# Altium PCB PCB.PcbDoc (part 1 of 3)
Units mil, origin at the board's own origin, x right, y up, seen from the top; angles counter-clockwise.
Board outline 8690 x 2710 mil, 2 copper layers (Top Layer, Bottom Layer); 78 components, 139 nets, 435 pads, 186 vias.
Unrouted connection lines stored in the file: 1.
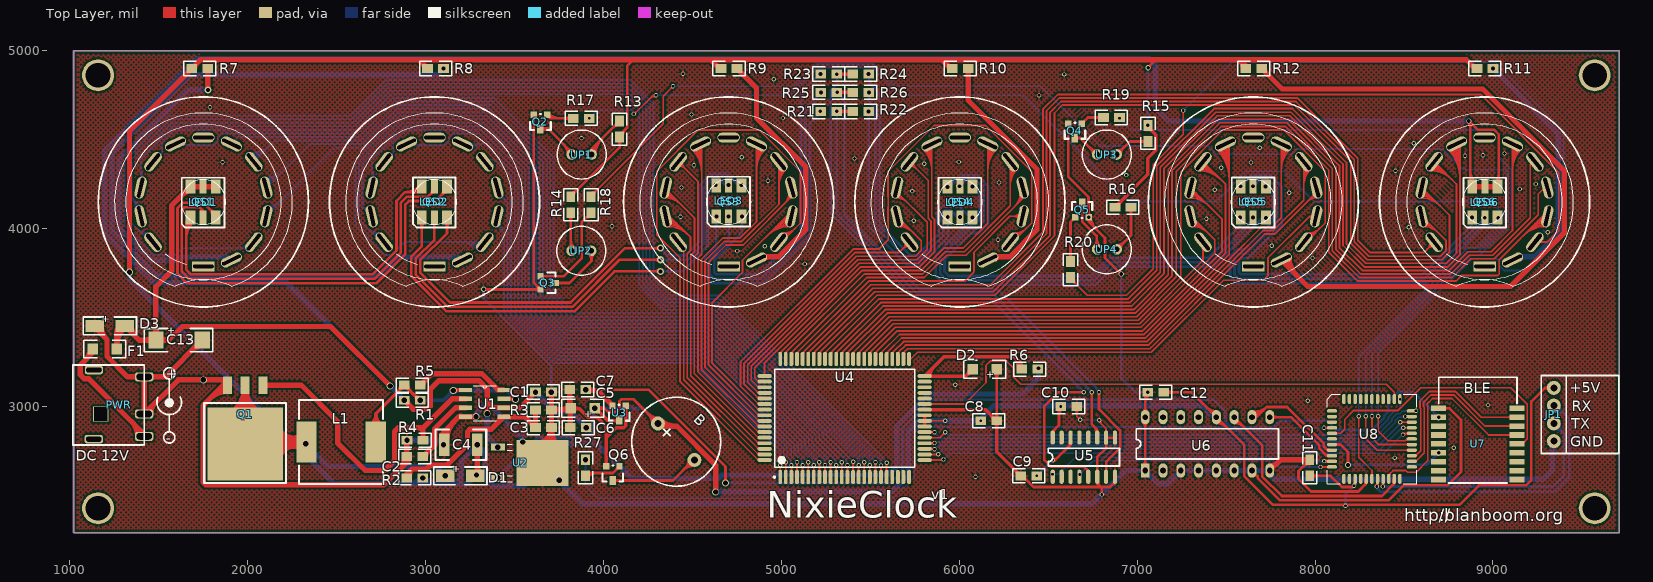
[diagram p0: Top Layer view]
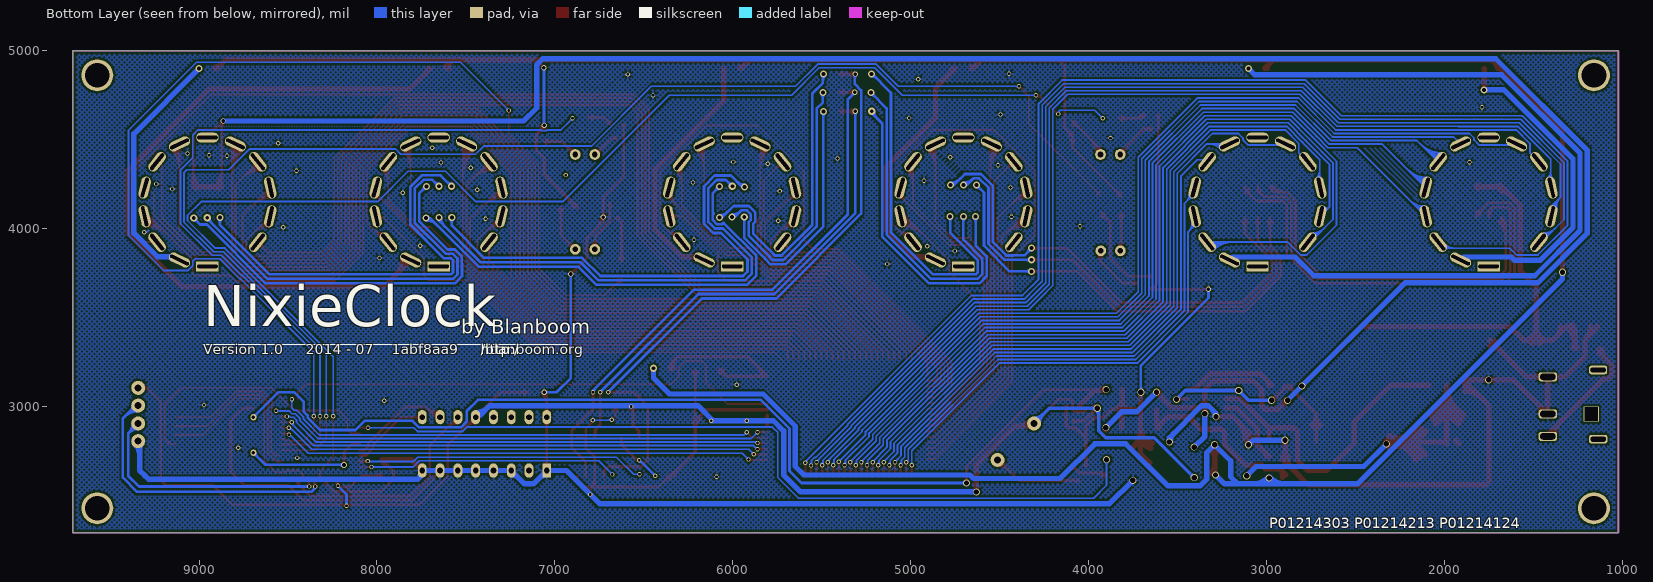
[diagram p1: Bottom Layer view, seen from below]

## Layer stack, top to bottom
Top Solder: solder mask 0.4, Solder Resist, Dk 3.5
Top Layer: signal copper 1.4
Dielectric 1: dielectric 12.6, FR-4, Dk 4.8
Bottom Layer: signal copper 1.4
Bottom Solder: solder mask 0.4, Solder Resist, Dk 3.5

## Board outline
1020,2290 1020,5000 9710,5000 9710,2290

## Design rules (kind name [scope] priority, off if disabled: settings)
Clearance [All] p1: gap=10
PolygonConnect [All] p1: connectstyle=Relief reliefconductorwidth=10 reliefentries=4 polygonreliefangle="90 Angle" airgapwidth=10
RoutingVias [All] p1: holewidth=28 width=50 viastyle="Through Hole" minholewidth=28 minwidth=50 maxholewidth=28 maxwidth=50
SolderMaskExpansion [All] p1: expansion=4
Width [All] p1: maxlimit=30 minlimit=10 preferedwidth=30 bottomlayer_prefwidth=10 minimp=50.000000 maximp=50.000000 favimp=50.000000
29 further rules are at their usual default settings.

## Components (designator, comment, footprint, x,y, rotation, side; value= is the part's Value field where it differs from the comment)
B "BEEP" BEEP 4302,2908 r315 top
C1 "Cap" 0805 3707,3081 r180 top
C2 "Cap" 0805 2894,2719 r0 top
C3 "Cap" 0805 3707,2881 r180 top
C4 "Cap Pol3" 1812 3290,2785 r180 top
C5 "Cap Pol1" 1206_Diode 3950,2990 r180 top
C6 "Cap" 0805 3812,2881 r0 top
C7 "Cap" 0805 3810,3095 r0 top
C8 "Cap" 0805 6210,2920 r180 top
C9 "Cap" 0805 6345,2610 r0 top
C10 "Cap" 0805 6660,3000 r180 top
C11 "Cap" 0805 7970,2610 r90 top
C12 "Cap" 0805 7150,3080 r180 top
C13 "Cap Pol1" 7343 1483,3373 r0 top
D1 "FR107" DO-214AC 3110,2610 r0 top
D2 "75V/0.5W" 1206_Diode 6210,3210 r180 top
D3 "1N4007" DO-214AC 1139,3453 r0 top
F1 "1A" 1206 1128,3323 r0 top
JP1 "Header4" HEADER4 9342,3105 r270 top
L1 "330uH" 330UH 2330,2800 r0 top
LED1 "LED_RGB_5050" LED_RGB_5050 1678,4236 r0 top
LED2 "LED_RGB_5050" LED_RGB_5050 2978,4237 r0 top
LED3 "LED_RGB_5050" LED_RGB_5050 4633,4242 r0 top
LED4 "LED_RGB_5050" LED_RGB_5050 5933,4236 r0 top
LED5 "LED_RGB_5050" LED_RGB_5050 7582,4237 r0 top
LED6 "LED_RGB_5050" LED_RGB_5050 8884,4236 r0 top
PWR "PWR" DC-044 1173,2958 r0 top
Q1 "IRF630" TO-263 2085,3120 r180 top
Q2 "A42" SOT-23-BJT 3645,4600 r180 top
Q3 "A42" SOT-23-BJT 3685,3695 r270 top
Q4 "A42" SOT-23-BJT 6650,4550 r180 top
Q5 "A42" SOT-23-BJT 6690,4105 r0 top
Q6 "9014" SOT-23-BJT 4052,2624 r180 top
QS1 "QS30-1" QS30-1 1750,4150 r0 top
QS2 "QS30-1" QS30-1 3049.21,4150 r0 top
QS3 "QS30-1" QS30-1 4702.76,4150 r0 top
QS4 "QS30-1" QS30-1 6002.76,4150 r0 top
QS5 "QS30-1" QS30-1 7652.76,4150 r0 top
QS6 "QS30-1" QS30-1 8952.76,4150 r0 top
R1 "Res2" 0805 2970,3035 r180 top
R2 "Res2" 0805 2984,2599 r180 top
R3 "Res2" 0805 3707,2981 r180 top
R4 "Res2" 0805 2895,2810 r0 top
R5 "Res2" 0805 2880,3120 r0 top
R6 "Res2" 0805 6350,3210 r0 top
R7 "Res2" 0805 1775,4900 r180 top
R8 "Res2" 0805 3100,4900 r180 top
R9 "Res2" 0805 4750,4900 r180 top
R10 "Res2" 0805 6050,4900 r180 top
R11 "Res2" 0805 9000,4900 r180 top
R12 "Res2" 0805 7700,4900 r180 top
R13 "Res2" 0805 4090,4515 r90 top
R14 "Res2" 0805 3815,4180 r270 top
R15 "Res2" 0805 7060,4580 r270 top
R16 "Res2" 0805 6875,4120 r0 top
R17 "Res2" 0805 3920,4620 r180 top
R18 "Res2" 0805 3930,4180 r270 top
R19 "Res2" 0805 6900,4625 r180 top
R20 "Res2" 0805 6625,3725 r90 top
R21 "Res2" 0805 5220,4659 r0 top
R22 "Res2" 0805 5400,4659 r0 top
R23 "Res2" 0805 5220,4869 r0 top
R24 "Res2" 0805 5400,4869 r0 top
R25 "Res2" 0805 5220,4766 r0 top
R26 "Res2" 0805 5400,4766 r0 top
R27 "Res2" 0805 3898,2701 r270 top
U1 "MC34063ADR2G" SO-8-M 3332,3018 r0 top
U2 "L78M05CDT" DPAK-M 3648,2683 r270 top
U3 "XC6206" SOT-23 4085,2925 r180 top
U4 "HV57708PG" PQFP80 5355,2935 r90 top
U5 "LPD6803" SO-16 6525,2605 r90 top
U6 "SD2405ALPI" DIP16 7045,2640 r90 top
U7 "RF-BM-S02" RF-BM-S02 8695,2570 r90 top
U8 "STC15F2K60S2_QFP44" LQFP44 8095,2975 r0 top
UP1 "Neon" NEON 3951.77,4416.57 r0 top
UP2 "Neon" NEON 3800,3875 r180 top
UP3 "Neon" NEON 6904.53,4416.57 r0 top
UP4 "Neon" NEON 6904.53,3883.43 r0 top

## Footprints (in the part's own frame and the unit in brackets; to place one, negate y for a bottom-side part, rotate by r counter-clockwise, add the part's x,y. Pads: shape width x height; smd on the part's side, far side on the other; paste and mask are expansions set on the pad)
330UH [mm]
  rect 2.9x5.9 smd: 1(0,0) 2(9.9,0)
  silkscreen extent -1.08,-6 10.92,6
0805 [mil]
  rect 60x50 smd: 1(0,0) 2(90,0)
  silkscreen extent -45,-40 135,40
1206 [mil]
  rect 60x60 smd: 1(0,0) 2(135,0)
  silkscreen extent -50,-50 185,50
1206_Diode [mil]
  rect 60x60 smd: 1(0,0) 2(135,0)
  silkscreen extent -50,-50 185,50
1812 [mil]
  rect 60x125 smd: 1(0,0) 2(185,0)
  silkscreen extent -50,-85 235,85
7343 [mm]
  rect 2.16x2.41 smd: 1(0,0) 2(6.61,0)
  silkscreen extent -1.65,-1.65 8.13,1.65
BEEP [mm]
  round 2 hole 1: 1(0.127,0) 2(7.493,0)
  silkscreen extent -2.54,-6.35 10.16,6.35
DC-044 [mm]
  rrect50% 2.6x1.3 hole 0.9 slot 2.2 at 0 deg: 1(6.2,-3.2) 2(6.2,0) 2(6.2,5.3)
  rrect50% 2.6x1.224 hole 0.7 slot 2.2 at 0 deg: 3(-1,-3.6) 3(-0.984,6.283)
  rect 2.2x2.2 hole 1.9 square: 3(0,0)
  silkscreen extent -4,-4.45 11.53,6.98
DIP16 [mil]
  rect 80x50 hole 32: 1(0,0)
  oval 80x50 hole 32: 2(0,-100) 3(0,-200) 4(0,-300) 5(0,-400) 6(0,-500) 7(0,-600) 8(0,-700) 9(300,-700) 10(300,-600) 11(300,-500) 12(300,-400) 13(300,-300) 14(300,-200) 15(300,-100) 16(300,0)
  silkscreen extent 65,-750 235,50
DO-214AC [mm]
  rect 2.65x1.75 smd: 1(4.3,0) 3(0,0)
  silkscreen extent -1.65,-1.27 5.97,1.27
DPAK-M [mil]
  rect 39x79 smd: 1(-88.58,-242.5) 2(88.58,-242.5)
  rect 260x292 smd: 3(0,8)
  silkscreen extent -106,-189 106,-162
HEADER4 [mm]
  round 2 hole 1: 1(0,0) 2(2.54,0) 3(5.08,0) 4(7.62,0)
  silkscreen extent -1.78,-1.78 9.4,9.27
LED_RGB_5050 [mm]
  rect 1.4x2 smd: 0(0,0) 1(3.6,0) 3(0,-4.4) 4(3.6,-4.4)
  rect 1x2 smd: 2(1.778,0) 5(1.778,-4.4)
  silkscreen extent -1.27,-5.84 4.83,1.27
LQFP44 [mm]
  oval 1.45x0.5 smd: 1(0,0) 2(0,-0.8) 3(0,-1.6) 4(0,-2.4) 5(0,-3.2) 6(0,-4) 7(0,-4.8) 8(0,-5.6) 9(0,-6.4) 10(0,-7.2) 11(0,-8) 23(11.4,-8) 24(11.4,-7.2) 25(11.4,-6.4) 26(11.4,-5.6) 27(11.4,-4.8) 28(11.4,-4) 29(11.4,-3.2) 30(11.4,-2.4) 31(11.4,-1.6) 32(11.4,-0.8) 33(11.4,0)
  oval 0.5x1.45 smd: 12(1.7,-9.7) 13(2.5,-9.7) 14(3.3,-9.7) 15(4.1,-9.7) 16(4.9,-9.7) 17(5.7,-9.7) 18(6.5,-9.7) 19(7.3,-9.7) 20(8.1,-9.7) 21(8.9,-9.7) 22(9.7,-9.7) 34(9.7,1.7) 35(8.9,1.7) 36(8.1,1.7) 37(7.3,1.7) 38(6.5,1.7) 39(5.7,1.7) 40(4.9,1.7) 41(4.1,1.7) 42(3.3,1.7) 43(2.5,1.7) 44(1.7,1.7)
  silkscreen extent -0.67,-10.38 12.08,2.37
NEON [mil]
  round 60 hole 31.5: 1(-20,0) 2(-130,0)
  silkscreen extent -213,-138 63,138
PQFP80 [mm] "QFP, 80-Leads, Body 14.00x20.00mm, Pitch 0.80mm, IPC Medium Density"
  oval 2.05x0.55 smd: 1(-8.425,9.2) 2(-8.425,8.4) 3(-8.425,7.6) 4(-8.425,6.8) 5(-8.425,6) 6(-8.425,5.2) 7(-8.425,4.4) 8(-8.425,3.6) 9(-8.425,2.8) 10(-8.425,2) 11(-8.425,1.2) 12(-8.425,0.4) 13(-8.425,-0.4) 14(-8.425,-1.2) 15(-8.425,-2) 16(-8.425,-2.8) 17(-8.425,-3.6) 18(-8.425,-4.4) 19(-8.425,-5.2) 20(-8.425,-6) 21(-8.425,-6.8) 22(-8.425,-7.6) 23(-8.425,-8.4) 24(-8.425,-9.2) 41(8.425,-9.2) 42(8.425,-8.4) 43(8.425,-7.6) 44(8.425,-6.8) 45(8.425,-6) 46(8.425,-5.2) 47(8.425,-4.4) 48(8.425,-3.6) 49(8.425,-2.8) 50(8.425,-2) 51(8.425,-1.2) 52(8.425,-0.4) 53(8.425,0.4) 54(8.425,1.2) 55(8.425,2) 56(8.425,2.8) 57(8.425,3.6) 58(8.425,4.4) 59(8.425,5.2) 60(8.425,6) 61(8.425,6.8) 62(8.425,7.6) 63(8.425,8.4) 64(8.425,9.2)
  oval 0.55x2.05 smd: 25(-6,-11.425) 26(-5.2,-11.425) 27(-4.4,-11.425) 28(-3.6,-11.425) 29(-2.8,-11.425) 30(-2,-11.425) 31(-1.2,-11.425) 32(-0.4,-11.425) 33(0.4,-11.425) 34(1.2,-11.425) 35(2,-11.425) 36(2.8,-11.425) 37(3.6,-11.425) 38(4.4,-11.425) 39(5.2,-11.425) 40(6,-11.425) 65(6,11.425) 66(5.2,11.425) 67(4.4,11.425) 68(3.6,11.425) 69(2.8,11.425) 70(2,11.425) 71(1.2,11.425) 72(0.4,11.425) 73(-0.4,11.425) 74(-1.2,11.425) 75(-2,11.425) 76(-2.8,11.425) 77(-3.6,11.425) 78(-4.4,11.425) 79(-5.2,11.425) 80(-6,11.425)
  silkscreen extent -8.55,-10 7,10.15, body extent -7,-10 7,10, height 3.4
QS30-1 [mm]
  rect 3.2x1.4 hole 0.5 slot 2.9 at 0 deg: 1(0,-9.2)
  oval 3.2x1.4 hole 0.5 slot 2.9 at 25.71 deg rot 25.71: 2(3.992,-8.289) 9(-3.992,8.289)
  oval 3.2x1.4 hole 0.5 slot 2.9 at 51.43 deg rot 51.43: 3(7.193,-5.736) 10(-7.193,5.736)
  oval 3.2x1.4 hole 0.5 slot 2.9 at 77.14 deg rot 77.14: 4(8.969,-2.047) 11(-8.969,2.047)
  oval 3.2x1.4 hole 0.5 slot 2.9 at 106.06 deg rot 102.86: 5(8.969,2.047)
  oval 3.2x1.4 hole 0.5 slot 2.9 at 128.57 deg rot 128.57: 6(7.193,5.736) 13(-7.193,-5.736)
  oval 3.2x1.4 hole 0.5 slot 2.9 at 154.29 deg rot 154.29: 7(3.992,8.289)
  oval 3.2x1.4 hole 0.5 slot 2.9 at 0 deg: 8(0,9.2)
  oval 3.2x1.4 hole 0.5 slot 2.9 at 102.86 deg rot 102.86: 12(-8.969,-2.047)
  silkscreen extent -15,-15 15,15
RF-BM-S02 [mm]
  rect 0.8x2.2 smd: 1(10.66,0.024) 2(9.39,0.024) 3(8.12,0.024) 4(6.85,0.024) 5(5.58,0.024) 6(4.31,0.024) 7(3.04,0.024) 8(1.77,0.024) 9(0.5,0.024) 10(0.5,-11.176) 11(1.77,-11.176) 12(3.04,-11.176) 13(4.31,-11.176) 14(5.58,-11.176) 15(6.85,-11.176) 16(8.12,-11.176) 17(9.39,-11.176) 18(10.66,-11.176)
  silkscreen extent 0,-11.2 15.1,0
SO-8-M [mil]
  rect 73x24 smd: 1(-107.5,75) 2(-107.5,25) 3(-107.5,-25) 4(-107.5,-75) 5(107.5,-75) 6(107.5,-25) 7(107.5,25) 8(107.5,75)
  silkscreen extent -65,-98 65,98
SO-16 [mil]
  oval 80x24 smd: 1(0,0) 2(0,-50) 3(0,-100) 4(0,-150) 5(0,-200) 6(0,-250) 7(0,-300) 8(0,-350) 9(220,-350) 10(220,-300) 11(220,-250) 12(220,-200) 13(220,-150) 14(220,-100) 15(220,-50) 16(220,0)
  silkscreen extent 60,-375 160,25
SOT-23 [mil]
  rect 36x36 smd: 1(-40,-80) 2(35,-80)
  rect 36x50 smd: 3(-2,0)
  silkscreen extent -60,-85 55,5
SOT-23-BJT [mil]
  rect 36x36 smd: 1(-37.5,-40) 2(37.5,-40)
  rect 36x50 smd: 3(0.5,40)
  silkscreen extent -58,-45 58,45
TO-263 [mil]
  rect 50x100 smd: 1(0,0) 2(100,0) 3(200,0)
  rect 425x410 smd: 2(100,330)
  silkscreen extent -130,100 330,550

## Part data
C1 C2 C3 C6 C7 C8 C9 C10 C11 C12: "Capacitor"
C4: "Polarized Capacitor (Surface Mount)"
C5 C13: "Polarized Capacitor (Radial)"
D1: library part "Diode 18TQ045", "Schottky Rectifier"
D2: library part "Diode 10TQ040", "Schottky Rectifier"
D3: library part Diode, "Default Diode"
F1: library part "Fuse 1", "Fuse"
JP1: library part "4 HEADER", "4 Pin Header"
L1: library part L
PWR: library part header2
Q1: "N-Channel MOSFET"
Q2 Q3 Q4 Q5 Q6: library part 2N3904, "NPN General Purpose Amplifier"
R1 R2 R3 R4 R5 R6 R7 R8 R9 R10 R11 R12 R13 R14 R15 R16 R17 R18 R19 R20 R21 R22 R23 R24 R25 R26 R27: "Resistor"
U1: library part MC34063ACD-TR, "Imported"
U2: "Imported"
U3: "3-Terminal Positive Voltage Regulator"

## Free pads (board coordinates)
  round 180 hole 140: 0(1157.79,4862.21) 1(9572.21,4862.21) 2(9572.2,2427.8) 3(1157.8,2427.8)

## Via types
v1: diameter 24, hole 15, Top Layer to Bottom Layer, 111 vias
v2: diameter 40, hole 22, Top Layer to Bottom Layer, 33 vias
v3: diameter 40, hole 30, Top Layer to Bottom Layer, 28 vias
v4: diameter 30, hole 20, Top Layer to Bottom Layer, 10 vias
v5: diameter 35, hole 20, Top Layer to Bottom Layer, 3 vias
v6: diameter 40, hole 20, Top Layer to Bottom Layer, 1 vias

## Nets (pads, with @x,y where several pads share a name; then routed paths per layer and width w, separated by ;. In a path a pad name is that pad's centre, name@x,y a point inside that pad or via, vN(x,y) a via of type N, cw(c..) or ccw(c..) an arc to the next point about the centre after c; other vN are vias at no path point)
BLE_BCTS: U7.15 U8.20 | length 1263.9
  Top Layer w10: U8.20@8413.9,2593.11 8413.9,2615.45 8438.45,2640 8510.02,2640 8520.02,2630 8567.61,2630 8634,2696.39 8634,3003.75 8630,3007.75 8630,3015.15 8659.85,3045 8770,3045 8975.32,2839.68 U7.15@9135,2839.68 ; U8.20@8418.74,2611.81 cw(c8439.21,2611.81) 8424.74,2626.29 ; U7.15@9099.84,2832.09 ccw(c9081.49,2813.74) 9081.49,2839.68 ccw(c9081.49,2865.63) U7.15@9099.84,2847.28
BLE_BRTS: U7.14 U8.5 | length 1598.2
  Top Layer w10: U8.5@8095,2849.02 8144.02,2849.02 8167,2872 8167,2927 8218,2978 8467,2978 8594,3105 9099.95,3105 9193.31,3011.65 9193.31,2817.72 9165.27,2789.68 U7.14@9135,2789.68 ; U8.5@8117.12,2845.59 cw(c8125.39,2837.32) 8125.39,2849.02 cw(c8125.39,2860.71) U8.5@8117.12,2852.44 ; U7.14@9162.56,2800.43 ccw(c9162.56,2832.92) 9185.53,2809.95 ; U7.14@9173.31,2789.68 cw(c9192.71,2789.68) 9178.99,2803.41
BLE_EN: U7.6 U8.7 | length 831.7
  Top Layer w15: U8.7@8095,2786.02 8142.98,2786.02 8185,2744 v5(8185,2671) ; v5@8177.93,2678.07 ccw(c8160.86,2695.14) 8185,2695.14 ccw(c8209.14,2695.14) v5@8192.07,2678.07
  Bottom Layer w15: v5(8185,2671) 8186.5,2672.5 8626.87,2672.5 v5(8694.06,2739.68) ; v5@8192.07,2663.93 cw(c8212.76,2643.24) 8212.76,2672.5 ; v5@8192.07,2678.07 ccw(c8205.52,2691.52) 8205.52,2672.5 ; v5@8684.06,2739.68 cw(c8659.91,2739.68) 8676.98,2722.61 cw(c8694.06,2705.54) v5@8694.06,2729.68
BLE_RX: U7.17 U8.25 | length 1028.3
  Top Layer w10: U8.25@8543.82,2723.03 8566.16,2723.03 8594,2750.87 8594,2987.18 8590,2991.18 8590,3031.72 8643.28,3085 8788.28,3085 8933.6,2939.68 U7.17@9135,2939.68 ; U8.25@8562.52,2727.87 ccw(c8562.52,2748.34) 8576.99,2733.87 ; U7.17@9099.84,2932.09 ccw(c9081.49,2913.74) 9081.49,2939.68 ccw(c9081.49,2965.63) U7.17@9099.84,2947.28
BLE_TX: U7.16 U8.24 | length 1054.5
  Top Layer w10: U8.24@8539.67,2695.69 8545.35,2690 8564.62,2690 8614,2739.38 8614,2995.47 8610,2999.47 8610,3023.43 8651.57,3065 8780,3065 8955.32,2889.68 U7.16@9135,2889.68 ; U8.24@8562.52,2696.38 ccw(c8562.52,2716.85) 8576.99,2702.37 ; U7.16@9099.84,2882.09 ccw(c9081.49,2863.74) 9081.49,2889.68 ccw(c9081.49,2915.63) U7.16@9099.84,2897.28
BUZ: R27.1 U8.4 | length 4832.2
  Top Layer w10: v1(8050,2880) 8094.49,2880 U8.4@8095,2880.51 ; v1@8054.95,2875.05 cw(c8066.9,2863.1) 8066.9,2880 cw(c8066.9,2896.9) v1@8054.95,2884.95 ; 8063.37,2880 ccw(c8063.37,2893.44) U8.4@8072.88,2883.94 ; 8065.84,2880 cw(c8065.84,2870.06) U8.4@8072.88,2877.09
  Bottom Layer w10: v3@3887.39,2690.39 cw(c3861.79,2664.79) 3898,2664.79 cw(c3934.21,2664.79) v3@3908.61,2690.39 ; v3(3898,2701) 3898,2557 3971,2484 5630,2484 5747,2601 5747,2854.57 5776.43,2884 7494.08,2884 7518.08,2860 7771.92,2860 7791.92,2880 v1(8050,2880) ; v1@8045.05,2875.05 ccw(c8033.1,2863.1) 8033.1,2880 ccw(c8033.1,2896.9) v1@8045.05,2884.95
DOT0: R17.1 U8.17 | length 7942.6
  Top Layer w10: v1(4170,4644) 4170,4655 4176.5,4648.5 4278,4750 v1(4295,4750) ; v1@4170,4651 ccw(c4170,4672.73) 4185.36,4657.36 ; v1@4177,4644 cw(c4189.07,4644) 4180.54,4652.54 ; 4254.03,4726.03 cw(c4295,4685.06) v1@4295,4743 ; 4271.1,4743.1 cw(c4295,4719.2) v1@4295,4753 ; v1@4290.05,4745.05 ccw(c4278.1,4733.1) 4278.1,4750 ccw(c4278.1,4766.9) v1@4290.05,4754.95 ; v1@8240.05,2940.05 cw(c8228.1,2928.1) 8245,2928.1 cw(c8261.9,2928.1) v1@8249.95,2940.05 ; v1(8245,2945) 8245,2715 8320,2640 8320,2593.7 U8.17@8319.41,2593.11 ; U8.17@8315.99,2615.23 ccw(c8306.29,2624.93) 8320,2624.93 ; 8320,2622.08 ccw(c8329.68,2622.08) U8.17@8322.83,2615.23
  Bottom Layer w10: v1(3920,4620) 3965,4665 4160,4665 ; v1@3920,4627 ccw(c3920,4643.9) 3931.95,4631.95 ccw(c3943.9,4620) v1@3927,4620 ; v1@4163.56,4646.73 ccw(c4148.23,4653.23) 4160,4665 ; v1(4170,4644) 4170,4655 4160,4665 ; v1@4290,4750 v1(4295,4750) 5046.5,4750 5201.5,4905 5234.5,4905 5235.5,4904 5514.5,4904 5668.5,4750 6357.09,4750 6955.11,4151.97 7444.47,4151.97 7614.5,4322 7825.48,4322 7995.5,4151.97 8987.53,4151.97 9065,4074.5 9065,4045.5 8909.85,3890.35 8854.75,3890.35 8245,3280.6 v1(8245,2945) ; v1@4299.95,4745.05 cw(c4311.9,4733.1) 4311.9,4750 cw(c4311.9,4766.9) v1@4299.95,4754.95 ; v1@8240.05,2949.95 ccw(c8228.1,2961.9) 8245,2961.9 ccw(c8261.9,2961.9) v1@8249.95,2949.95
DOT1: R18.1 U8.26 | length 8175.7
  Top Layer w10: R18.1@3930,4185 4335,4590 4335,4745 v1(4390,4800) ; R18.1@3930,4205 ccw(c3930,4253.28) 3964.14,4219.14 ccw(c3998.28,4185) R18.1@3950,4185 ; v1@4383,4800 cw(c4366.1,4800) 4378.05,4788.05 cw(c4390,4776.1) v1@4390,4793 ; v1@8280.05,2940.05 cw(c8268.1,2928.1) 8285,2928.1 cw(c8301.9,2928.1) v1@8289.95,2940.05 ; v1(8285,2945) 8285,2819 8349.47,2754.53 U8.26@8543.82,2754.53 ; U8.26@8521.69,2751.1 ccw(c8513.43,2742.84) 8513.43,2754.53 ccw(c8513.43,2766.22) U8.26@8521.69,2757.95
  Bottom Layer w10: v1(4390,4800) 5068.22,4800 5193.22,4925 5521.78,4925 5646.78,4800 6457.46,4800 6793.46,4464 7399.61,4464 7445.8,4417.81 7864.99,4417.81 7895.36,4448.18 8715.43,4448.18 8832.61,4331 9069,4331 9085,4315 9085,4037.22 8918.14,3870.35 8863.04,3870.35 8285,3292.32 v1(8285,2945) ; v1@4394.95,4795.05 cw(c4406.9,4783.1) 4406.9,4800 cw(c4406.9,4816.9) v1@4394.95,4804.95 ; v1@8280.05,2949.95 ccw(c8268.1,2961.9) 8285,2961.9 ccw(c8301.9,2961.9) v1@8289.95,2949.95
DOT2: R19.1 U8.27 | length 4603.6
  Top Layer w10: v1@8315.05,2940.05 cw(c8303.1,2928.1) 8320,2928.1 cw(c8336.9,2928.1) v1@8324.95,2940.05 ; v1(8320,2945) 8320,2824 8357.98,2786.02 U8.27@8543.82,2786.02 ; U8.27@8521.69,2782.6 ccw(c8513.43,2774.33) 8513.43,2786.02 ccw(c8513.43,2797.71) U8.27@8521.69,2789.45
  Bottom Layer w10: v1@6900,4613 cw(c6900,4596.1) 6911.95,4608.05 cw(c6923.9,4620) v1@6907,4620 ; v1(6900,4620) 6965.24,4554.76 7042.81,4554.76 7047.57,4550 7072.43,4550 7077.19,4554.76 9005.82,4554.76 9035,4525.58 9035,4399 9105,4329 9105,4028.93 8926.42,3850.35 8875.27,3850.35 8761.74,3736.82 8757.79,3736.82 8320,3299.03 v1(8320,2945) ; v1@8315.05,2949.95 ccw(c8303.1,2961.9) 8320,2961.9 ccw(c8336.9,2961.9) v1@8324.95,2949.95
DOT3: R20.1 U8.28 | length 6769.8
  Top Layer w10: R20.1@6625,3700 cw(c6625,3651.72) 6659.14,3685.86 cw(c6693.28,3720) R20.1@6645,3720 ; R20.1@6625,3720 6720,3625 6940,3625 7090,3775 7090,4360.67 7259,4529.67 v1(7259,4664) ; v1@7254.05,4659.05 cw(c7242.1,4647.1) 7259,4647.1 cw(c7275.9,4647.1) v1@7263.95,4659.05 ; v1@8350.05,2940.05 cw(c8338.1,2928.1) 8355,2928.1 cw(c8371.9,2928.1) v1@8359.95,2940.05 ; v1(8355,2945) 8355,2862 8410,2807 8506,2807 ; U8.28@8524.27,2812.75 ccw(c8520.65,2792.35) 8506,2807 ; U8.28@8543.82,2817.52 8516.52,2817.52 8506,2807
  Bottom Layer w10: v1(7259,4664) 7530,4935 9014.5,4935 9396.85,4552.65 9396.85,3962.09 9199.9,3765.14 9060.11,3765.14 9034.83,3790.42 9034.83,3817.48 9021.96,3830.35 8883.55,3830.35 8770.02,3716.82 8766.07,3716.82 8355,3305.75 v1(8355,2945) ; v1@7259,4671 ccw(c7259,4687.9) 7270.95,4675.95 ccw(c7282.9,4664) v1@7266,4664 ; v1@8350.05,2949.95 ccw(c8338.1,2961.9) 8355,2961.9 ccw(c8371.9,2961.9) v1@8359.95,2949.95
GND: C1.1 C2.1 C3.1 C4.2 C5.2 C6.1 C7.1 C8.1 C9.1 C10.1 C11.2 C12.2 C13.2 D2.1 D3.3 JP1.4 PWR.2 Q1.3 Q2.2 Q3.2 Q4.2 Q5.2 Q6.2 R3.1 R4.1 U1.4 U2.3 U3.1 U4.34 U5.6 U5.8 U5.9 U5.10 U6.1 U6.3 U6.4 U6.5 U6.6 U6.7 U6.8 U6.16 U7.1 U8.16 | length 24903
  Top Layer w10: C10.1@6645.86,2985.86 cw(c6611.72,2951.72) 6660,2951.72 cw(c6708.28,2951.72) C10.1@6674.14,2985.86 ; C10.1@6660,3000 6660,2945 v1(6680,2925) ; v1@6673,2925 ccw(c6656.1,2925) 6668.05,2936.95 ccw(c6680,2948.9) v1@6680,2932 ; v1(6786,2923) 6786,2914 6825,2875 U5.10@6825,2825 ; v1@6793,2923 ccw(c6831.63,2923) 6804.31,2895.69 ; U5.10@6820.05,2857.95 ccw(c6808.1,2869.9) 6825,2869.9 ccw(c6841.9,2869.9) U5.10@6829.95,2857.95
  Top Layer w15: v4@3325,3657.5 Q3.2@3645,3657.5 3607.5,3695 Q2.2@3607.5,4640 ; v4@3330.3,3665.3 ccw(c3349.14,3684.14) 3349.14,3657.5 ; Q2.2@3600.08,4632.58 cw(c3582.15,4614.65) 3607.5,4614.65 cw(c3632.85,4614.65) Q2.2@3614.92,4632.58 ; Q3.2@3634.5,3657.5 ccw(c3609.15,3657.5) 3627.08,3675.42 ccw(c3645,3693.35) Q3.2@3645,3668 ; Q3.2@3637.58,3650.08 ccw(c3619.65,3632.15) 3619.65,3657.5 ccw(c3619.65,3682.85) Q3.2@3637.58,3664.92 ; D2.1@6194.09,3194.09 cw(c6155.68,3155.68) 6210,3155.68 cw(c6264.32,3155.68) D2.1@6225.91,3194.09 ; C8.1@6197.63,2932.37 ccw(c6167.75,2962.25) 6210,2962.25 ccw(c6252.25,2962.25) C8.1@6222.37,2932.37 ; C8.1@6210,2920 D2.1@6210,3210 ; C9.1@6345,2610 6355.25,2610 6417.75,2547.5 6795,2547.5 ; C9.1@6350,2592.5 cw(c6350,2537.57) 6388.84,2576.41 ; C9.1@6367.5,2610 ccw(c6397.07,2610) 6376.16,2589.09 ; Q4.2@6605.08,4582.58 cw(c6587.15,4564.65) 6612.5,4564.65 cw(c6637.85,4564.65) Q4.2@6619.92,4582.58 ; Q4.2@6612.5,4590 6612.5,4290.75 6726,4177.25 6726,4066.5 v4(6727.5,4065) 6727.5,4039.61 6819,3948.11 6819,3836 v4(6910,3745) ; Q5.2@6720.08,4057.58 cw(c6702.15,4039.65) 6727.5,4039.65 cw(c6752.85,4039.65) Q5.2@6734.92,4057.58 ; Q5.2@6720.08,4072.42 ccw(c6705.77,4086.73) 6726,4086.73 ccw(c6749.23,4086.73) Q5.2@6732.8,4070.3 ; Q5.2@6722.2,4059.7 cw(c6709.39,4046.89) 6727.5,4046.89 cw(c6745.61,4046.89) Q5.2@6732.8,4059.7 ; Q5.2@6723,4065 ccw(c6773.44,4065) 6737.77,4029.33 ; Q5.2@6723.75,4058.5 cw(c6697.38,4012.84) 6748.32,4026.48 ; 6726,4093.97 ccw(c6756.47,4093.97) Q5.2@6734.92,4072.42 ; Q5.2@6727.81,4047.05 cw(c6738.65,4049.96) Q5.2@6731.97,4058.98 ; Q5.2@6738,4065 ccw(c6824.65,4065) 6763.38,4003.73 ; U5.6@6779.5,2577 ccw(c6813.3,2577) 6789.4,2553.1 ; v1(6800,2505) 6800,2542.5 6795,2547.5 ; 6865.9,2565.9 ccw(c6854.81,2577) U5.8@6870.5,2577 ; U5.8@6875,2575 6847.5,2547.5 6795,2547.5 ; U5.8@6875,2585.28 U5.8@6875,2605 ; U5.9@6875,2825 U5.10@6825,2825 6825,2765 6775,2715 U5.6@6775,2605 6775,2567.5 6795,2547.5 ; v4@6902.5,3745 ccw(c6884.39,3745) 6897.2,3757.8 ccw(c6910,3770.61) v4@6910,3752.5 ; U6.1@7032.63,2667.37 ccw(c7002.75,2697.25) 7045,2697.25 ccw(c7087.25,2697.25) U6.1@7057.37,2667.37 ; U6.16@7032.63,2912.63 cw(c7002.75,2882.75) 7045,2882.75 cw(c7087.25,2882.75) U6.16@7057.37,2912.63 ; U6.16@7032.63,2967.37 ccw(c7002.75,2997.25) 7045,2997.25 ccw(c7087.25,2997.25) U6.16@7057.37,2967.37 ; U6.1@7045,2640 U6.16@7045,2940 C12.2@7045,3060 ; 7045,3013.61 cw(c7121.39,3013.61) C12.2@7067.37,3067.63 ; 7045,3049.82 cw(c7085.18,3049.82) C12.2@7056.77,3078.23 ; C12.2@7046.98,3061.27 cw(c7068.32,3048.95) C12.2@7061.94,3072.76 ; 7051.23,3039.67 ccw(c7015.7,3060.18) C12.2@7053.15,3076.94 ; C12.2@7052.51,3079.6 cw(c7026.78,3078.22) C12.2@7045,3060 ; C12.2@7060,3085 7060,3075 C12.2@7045,3060 ; C12.2@7065.92,3065.11 ccw(c7048.8,3074.99) C12.2@7066.85,3083.06 ; U6.7@7645,2640 7677.5,2607.5 ; U6.7@7654.27,2610.15 cw(c7664.21,2594.21) 7677.5,2607.5 ; 7931.59,2661.59 cw(c7970,2623.18) C11.2@7970,2677.5 ; 7943.66,2673.66 ccw(c7922.32,2695) C11.2@7952.5,2695 ; C11.2@7970,2700 7907.14,2637.14 7907.14,2593.11 7978.18,2522.07 8242.74,2522.07 8283.76,2563.08 ; 8278.84,2558.17 ccw(c8262.6,2574.41) U8.16@8285.57,2574.41 ; 8283.76,2562.35 cw(c8295.87,2562.35) U8.16@8289.2,2572.45 ; U8.16@8285.76,2573.49 cw(c8277.08,2569.76) 8283.76,2563.08 ; U8.16@8287.91,2593.11 8283.76,2588.96 8283.76,2563.08 ; U7.1@8694.06,2989.68 8755.32,2989.68 8820,2925 8820,2631.83 8744.61,2556.44 8497.59,2556.44 8413.22,2472.07 7802.47,2472.07 7677.5,2597.04 7677.5,2607.5 ; U7.1@8727.45,2983.85 cw(c8741.53,2969.77) 8741.53,2989.68 cw(c8741.53,3009.6) U7.1@8727.45,2995.52
  Top Layer w20: C5.2@3812,2987 3864.72,2987 ; C5.2@3829.14,2975.86 cw(c3856.04,2948.96) 3856.04,2987 ; C5.2@3830.24,3002.95 ccw(c3864.71,3032.23) 3864.71,2987 ; Q6.2@4008.84,2669.66 ccw(c3995.19,2683.31) 4014.5,2683.31 ccw(c4033.81,2683.31) Q6.2@4020.16,2669.66 ; Q6.2@4014.5,2675.5 Q6.2@4014.5,2664 4014.5,2824.5 ; U3.1@4119.34,2999.34 cw(c4105.69,2985.69) 4125,2985.69 cw(c4144.31,2985.69) U3.1@4130.66,2999.34 ; U3.1@4125,3005 4125,2891.72 4113.28,2880 4070,2880 4014.5,2824.5 ; U4.34@5804.8,2982.24 6147.76,2982.24 C8.1@6210,2920 6210,2745 C9.1@6345,2610 ; 6175.86,2954.14 cw(c6141.72,2920) C8.1@6190,2920 ; C8.1@6187.93,2942.07 ccw(c6205,2959.14) C8.1@6205,2935 ; C8.1@6199.39,2909.39 cw(c6173.79,2883.79) 6210,2883.79 cw(c6246.21,2883.79) C8.1@6220.61,2909.39 ; 6310.86,2644.14 cw(c6276.72,2610) C9.1@6325,2610 ; C9.1@6322.93,2632.07 ccw(c6340,2649.14) C9.1@6340,2625 ; 3864.72,2987 3911.72,2940 3962.57,2940 4014.5,2888.07 4014.5,2824.5
  Top Layer w30: D3.3@1139,3453 1139,3444.76 1208,3375.76 ; D3.3@1176.17,3452.94 ccw(c1284.85,3452.61) 1208,3375.76 ; PWR.2@1453.28,2958 cw(c1540.62,2958) 1478.86,3019.76 ; 1687.86,3317.62 cw(c1743.24,3262.24) C13.2@1743.24,3340.56 ; 1699.74,3329.5 ccw(c1661.16,3368.08) C13.2@1715.72,3368.08 ; C13.2@1743.24,3373 1536.9,3166.66 PWR.2@1417.09,3166.66 ; v3(1750,3150) 1609.09,3150 PWR.2@1417.09,2958 PWR.2@1417.09,3166.66 ; v3@1750.24,3150 1855,3150 ; 1786.23,3044.09 cw(c1885,2945.32) Q1.3@1885,3085 ; 1837.45,3095.3 cw(c1885,3047.75) Q1.3@1885,3115 ; 1848.79,3150 cw(c1848.79,3108.79) Q1.3@1877.93,3137.93 ; Q1.3@1877,3139 ccw(c1855,3122.5) 1855,3150 ; C2.1@2879.06,2717.87 cw(c2795.62,2708.39) 2855,2649 ; 2894,2783.44 cw(c2921.56,2783.44) R4.1@2902.07,2802.93 ; v3(2895,2810) 2894,2809 C2.1@2894,2719 2894,2688 2855,2649 ; 2899,2693 ccw(c2874.63,2717.37) C2.1@2908.87,2721.26 ; C4.2@3090,2817.5 cw(c3156.39,2817.5) 3109.45,2864.45 ; C4.2@3094.39,2828.11 ccw(c3068.79,2853.71) 3105,2853.71 ccw(c3141.21,2853.71) C4.2@3115.61,2828.11 ; C4.2@3096.46,2788.54 ccw(c3075.86,2809.14) C4.2@3105,2809.14 ; C4.2@3105,2785 3105,2860 3188,2943 U1.4@3224.5,2943 v3(3283,2943) v3@3285,2945 ; C4.2@3120,2817.5 cw(c3258.82,2817.5) 3160.66,2915.66 ; 3184.64,2939.64 cw(c3200,2924.27) U1.4@3200,2946 ; U2.3@3640.87,2793.71 ccw(c3616.33,2880.99) C3.1@3707,2881 ; U2.3@3648.99,2764.83 ccw(c3627.46,2841.4) 3707,2841.4 ; U2.3@3668,2671 U2.3@3656,2683 3707,2734 C3.1@3707,2881 ; C3.1@3707,2876.14 ccw(c3865.14,2876.14) U2.3@3753.32,2764.32 ; C1.1@3707,3081 R3.1@3707,2981 ; 3757.06,2981 ccw(c3757.06,3047.94) C5.2@3804.39,3000.61 ; 3810,3038.28 ccw(c3863.28,3038.28) C5.2@3825.61,3000.61 ; C7.1@3810,3095 3810,2995 C5.2@3815,2990 C5.2@3812,2987 ; C6.1@3812,2881 C5.2@3812,2987 ; 3812,2946.54 cw(c3858.46,2946.54) C5.2@3825.61,2979.39 ; U6.8@7745,2640 7805,2700 C11.2@7970,2700 ; U6.8@7745,2665 ccw(c7745,2725.36) 7787.68,2682.68 ; 1208,3375.76 1208,3282.64 1323.98,3166.66 PWR.2@1417.09,3166.66 ; 1855,3150 Q1.3@1885,3120 1862.14,3120 1747.5,3005.36 1747.5,2574.64 1762.14,2560 2764.64,2560 2853.64,2649 2855,2649 ; C3.1@3707,2881 R3.1@3707,2981 ; R3.1@3707,2981 3806,2981 C5.2@3812,2987
  Bottom Layer w10: v1@6680,2923 v1(6786,2923) v1@6786,2914 ; v1@6684.95,2920.05 cw(c6692.07,2912.93) 6692.07,2923 ; v1@6684.95,2929.95 ccw(c6701.73,2946.73) 6701.73,2923 ; v1@6781.05,2918.05 ccw(c6769.1,2906.1) 6769.1,2923 ccw(c6769.1,2939.9) v1@6781.05,2927.95 ; 9282.26,3990.78 9293.04,3980 v1(9308,3980)
  Bottom Layer w15: v4@3319.7,3654.7 cw(c3306.89,3641.89) 3325,3641.89 cw(c3343.11,3641.89) v4@3330.3,3654.7 ; v4(3325,3660) 3325,3610 3705,3230 v3(3705,3080) ; v3@3696.16,3088.84 ccw(c3674.82,3110.18) 3705,3110.18 ccw(c3735.18,3110.18) v3@3713.84,3088.84 ; v4@6904.7,3739.7 cw(c6891.89,3726.89) 6910,3726.89 cw(c6928.11,3726.89) v4@6915.3,3739.7 ; v4(6910,3745) 6910,3160 6990,3080 v4(7060,3080) ; v4@7054.7,3074.7 ccw(c7041.89,3061.89) 7041.89,3080 ccw(c7041.89,3098.11) v4@7054.7,3085.3
  Bottom Layer w30: v3(2895,2810) 3075,2810 v3(3100,2785) ; v3(3283,2943) 3283,2961.64 3326.36,3005 3363.64,3005 3545,2823.64 v3(3545,2800) ; v3@3288,2943 cw(c3345.07,2943) 3304.72,2983.36 ; 3519.75,2848.89 cw(c3470.86,2800) v3@3540,2800 ; v3(3750,2585) 3881,2454 6749,2454 v1(6800,2505) 6935,2640 U6.1@7045,2640 7120,2565 7170,2565 U6.3@7245,2640 U6.4@7345,2640 U6.5@7445,2640 U6.6@7545,2640 U6.7@7645,2640 U6.8@7745,2640 7745,2615 7769,2591 ; U6.1@7045,2615 cw(c7045,2554.64) 7087.68,2597.32 ; 7202.32,2597.32 cw(c7245,2554.64) U6.3@7245,2615 ; U6.8@7755,2624.96 ccw(c7802.79,2624.8) 7769,2591 ; JP1.4@9324.77,2787.77 cw(c9302.48,2765.48) 9334,2765.48 ; 9334,2726.85 cw(c9420.15,2726.85) JP1.4@9359.23,2787.77 ; JP1.4@9342,2805 9334,2797 9334,2640 9305,2611 9305,2612 9284,2591 7769,2591
  other v1: 6091,2605 8448,2711 8779,2768 8972,3008 7959,3032 5977,3123 5131,3801 7985,3835 4751,3874 4906,3901 7757,3904 6217,3937 8526,4007 4047,4013 5744,4044 7389,4056 4432,4067 7854,4202 5735,4211 7436,4219 9150,4223 4438,4231 9241,4251 6223,4259 4924,4269 8452,4326 7472,4342 4508,4357 5802,4364 7640,4372 1857,4373 5997,4375 5411,4394 4777,4401 8843,4409 8944,4413 9065,4422 7689,4454 8555,4480 3876,4509 5008,4622 4494,4642 1787,4682 6448,4749 4957,4840 6590,4867 4446,4870
HVCLK: U4.30 U8.33 | length 2993.9
  Top Layer w10: U4.30@5804.8,2856.26 5858.74,2856.26 v1(5860,2855) ; U4.30@5838.45,2852.14 cw(c5848.4,2842.19) 5848.4,2856.26 cw(c5848.4,2870.33) U4.30@5838.45,2860.38 ; U4.30@5840.06,2856.26 cw(c5840.06,2835.06) v1@5855.05,2850.05 ; U4.30@5844.35,2857.34 ccw(c5847.32,2868.41) v1@5855.19,2860.09 ; 5846.14,2856.26 ccw(c5846.14,2868.86) v1@5855.05,2859.95 ; 5847.38,2856.53 cw(c5844.58,2846.1) v1@5853.94,2851.5 ; U8.33@8542,2976.82 U8.33@8543.82,2975 ; U8.33@8559,2976 v1(8567,2976)
  Bottom Layer w10: v1@5860,2848 cw(c5860,2831.1) 5871.95,2843.05 cw(c5883.9,2855) v1@5867,2855 ; v1@5865.36,2855 v1(5860,2855) 5895,2820 8331.82,2820 8432,2920.18 8432,2931.62 8459.53,2959.15 8477.15,2959.15 8493,2975 v1@8567,2975 ; 8547.69,2975 ccw(c8547.69,2995.31) v1@8562.05,2980.95 ; 8552.51,2975 cw(c8552.51,2961.51) v1@8562.05,2971.05 ; v1@8559,2976 v1(8567,2976)
HVDIN1: U4.25 U8.29 | length 2936.8
  Top Layer w10: U4.25@5804.8,2698.78 5907.78,2698.78 v1(5911,2702) ; U4.25@5838.45,2694.66 cw(c5848.4,2684.71) 5848.4,2698.78 cw(c5848.4,2712.85) U4.25@5838.45,2702.9 ; 5886.33,2698.78 ccw(c5886.33,2726.67) v1@5906.05,2706.95 ; v1@8495.98,2849.02 U8.29@8543.82,2849.02 ; v1@8498.95,2837.05 cw(c8527.84,2808.16) U8.29@8527.84,2849.02 ; U8.29@8521.69,2845.59 ccw(c8513.43,2837.32) 8513.43,2849.02 ccw(c8513.43,2860.71) U8.29@8521.69,2852.44
  Bottom Layer w10: v1@5907.78,2698.78 5946,2737 8386,2737 v1@8490.21,2841.21 ; v1@5911,2709 ccw(c5911,2725.9) 5922.95,2713.95 ccw(c5934.9,2702) v1@5918,2702 ; 8476.93,2827.93 cw(c8494,2810.86) v1@8494,2835
  other v1: 8494,2842
HVDIN2: U4.26 U8.30 | length 2950.6
  Top Layer w10: U4.26@5804.8,2730.28 v1@5880,2730 ; U4.26@5838.44,2726.14 cw(c5848.09,2716.42) 5848.14,2730.12 ; U4.26@5838.47,2734.38 ccw(c5848.71,2744.55) 5848.66,2730.11 ; 5861.67,2730.07 ccw(c5861.75,2750.39) v1@5876.07,2735.97 ; 5866.52,2730.05 cw(c5866.47,2716.58) v1@5876.03,2726.07 ; v1@8495,2880 v1(8495.51,2880.51) U8.30@8543.82,2880.51 ; v1@8500.46,2875.56 cw(c8512.41,2863.61) 8512.41,2880.51 cw(c8512.41,2897.41) v1@8500.46,2885.46 ; U8.30@8521.69,2877.09 ccw(c8513.43,2868.82) 8513.43,2880.51 ccw(c8513.43,2892.2) U8.30@8521.69,2883.94
  Bottom Layer w10: v1@5880,2730 5910,2760 8367,2760 8487.51,2880.51 v1(8495.51,2880.51) ; v1@5881,2738 ccw(c5881,2754.9) 5892.95,2742.95 ccw(c5904.9,2731) v1@5888,2731 ; 8469.91,2862.91 cw(c8495.51,2837.3) v1@8495.51,2873.51
  other v1: 5881,2731
HVDIN3: U4.27 U8.31 | length 2974.5
  Top Layer w10: U4.27@5804.8,2761.77 5858.23,2761.77 v1(5860,2760) ; U4.27@5838.45,2757.65 cw(c5848.4,2747.7) 5848.4,2761.77 cw(c5848.4,2775.84) U4.27@5838.45,2765.89 ; U4.27@5838.82,2761.77 cw(c5838.82,2738.82) v1@5855.05,2755.05 ; U4.27@5843.53,2763.08 ccw(c5847.14,2776.58) v1@5855.71,2765.53 ; 5846.35,2762.32 cw(c5843.12,2750.26) v1@5853.94,2756.5 ; 5847.38,2761.77 ccw(c5847.38,2772.62) v1@5855.05,2764.95 ; v1@8479,2912.01 U8.31@8543.82,2912.01 ; v1@8483.95,2907.2 cw(c8495.56,2895.58) 8495.56,2912.01 ; v1@8483.95,2917.1 ccw(c8496.24,2929.38) 8496.24,2912.01 ; U8.31@8521.69,2908.58 ccw(c8513.43,2900.32) 8513.43,2912.01 ccw(c8513.43,2923.7) U8.31@8521.69,2915.43
  Bottom Layer w10: v1(5860,2760) 5863.28,2760 5883.28,2780 8356,2780 8479,2903 v1(8479,2912.15) ; v1@5860,2767 ccw(c5860,2791.83) 5877.56,2774.27 ; 8460.58,2884.58 ccw(c8433.02,2912.15) v1@8472,2912.15
HVDIN4: U4.28 U8.32 | length 2972.8
  Top Layer w10: U4.28@5804.8,2793.27 5858.27,2793.27 v1(5860,2795) ; U4.28@5838.45,2789.15 cw(c5848.4,2779.2) 5848.4,2793.27 cw(c5848.4,2807.33) U4.28@5838.45,2797.39 ; U4.28@5838.92,2793.27 ccw(c5838.92,2816.08) v1@5855.05,2799.95 ; U4.28@5843.59,2791.98 cw(c5847.15,2778.68) v1@5855.67,2789.5 ; 5846.43,2792.74 ccw(c5843.23,2804.68) v1@5853.94,2798.5 ; 5847.28,2793.27 cw(c5847.28,2782.28) v1@5855.05,2790.05 ; v1@8509.08,2946.01 8501.01,2946.01 8498.5,2943.5 U8.32@8543.82,2943.5 ; v1@8511.52,2938.55 cw(c8523.47,2926.6) 8523.47,2943.5 cw(c8523.47,2960.4) v1@8511.52,2948.45 ; U8.32@8521.69,2940.08 ccw(c8513.43,2931.81) 8513.43,2943.5 ccw(c8513.43,2955.19) U8.32@8521.69,2946.93
  Bottom Layer w10: v1(5860,2795) 5865,2800 8340.11,2800 8452,2911.89 8452,2923.33 8467.82,2939.15 8485.72,2939.15 8490.07,2943.5 ; v1@8501.54,2938.64 ccw(c8490.07,2927.55) 8490.07,2943.5 ; v1@8501.54,2948.37 cw(c8490.07,2959.45) 8490.07,2943.5 ; v1@8509.08,2946.01 v1(8506.58,2943.5) 8490.07,2943.5
HVLE: U4.29 U8.34 | length 2915.5
  Top Layer w10: U4.29@5804.8,2824.76 5889.76,2824.76 v1(5920,2855) ; U4.29@5838.45,2820.64 cw(c5848.4,2810.7) 5848.4,2824.76 cw(c5848.4,2838.83) U4.29@5838.45,2828.88 ; v1@5913,2855 cw(c5896.1,2855) 5908.05,2843.05 cw(c5920,2831.1) v1@5920,2848 ; U8.34@8476.89,3041.93 U8.34@8479.96,3045
  Bottom Layer w10: v1@5920,2848 cw(c5920,2831.1) 5931.95,2843.05 cw(c5943.9,2855) v1@5927,2855 ; v1(5920,2855) 5935,2840 8323.54,2840 8412,2928.46 8412,2939.9 8451.25,2979.15 8464.15,2979.15 8479,2994 v1@8479,3040 ; v1@8473.05,3035.05 cw(c8458.69,3020.69) 8479,3020.69 ; 8479,3025.51 cw(c8492.49,3025.51) v1@8482.95,3035.05
  other v1: 8478,3040
HVPOL: U4.35 U8.35 | length 2977
  Top Layer w10: U4.35@5804.8,3013.74 6028.74,3013.74 6150,3135 6150,3231.21 6173.79,3255 6265,3255 6305,3215 6305,3165 6345,3125 8400,3125 8445.39,3079.61 U8.35@8445.39,3041.93 ; U4.35@5838.45,3009.62 cw(c5848.4,2999.67) 5848.4,3013.74 cw(c5848.4,3027.81) U4.35@5838.45,3017.86 ; U8.35@8441.97,3064.05 ccw(c8433.7,3072.32) 8445.39,3072.32 ccw(c8457.08,3072.32) U8.35@8448.82,3064.05
LED_B: R21.2 R22.1 U5.11 | length 3011.9
  Top Layer w15: v4(5310,4659) R22.1@5400,4659 ; R21.2@5315.3,4653.7 cw(c5328.11,4640.89) 5328.11,4659 cw(c5328.11,4677.11) R21.2@5315.3,4664.3 ; R21.2@5327.37,4646.63 cw(c5357.25,4616.75) 5357.25,4659 cw(c5357.25,4701.25) R21.2@5327.37,4671.37 ; R22.1@5382.63,4646.63 ccw(c5352.75,4616.75) 5352.75,4659 ccw(c5352.75,4701.25) R22.1@5382.63,4671.37 ; v1(6745,3080) 6745,2900 6775,2870 U5.11@6775,2825 ; 6755.3,2889.7 cw(c6718.59,2853) U5.11@6770.5,2853
  Bottom Layer w15: v4@5304.7,4653.7 cw(c5291.89,4640.89) 5310,4640.89 cw(c5328.11,4640.89) v4@5315.3,4653.7 ; v4(5310,4659) 5310,4087.01 5765.01,3632 6193,3632 v1(6745,3080)
LED_DCLK: U5.4 U8.11 | length 1563.4
  Top Layer w10: v1(8030,2660.04) U8.11@8095,2660.04 ; v1@8034.95,2655.09 cw(c8046.9,2643.14) 8046.9,2660.04 cw(c8046.9,2676.94) v1@8034.95,2664.99 ; U8.11@8072.88,2656.61 ccw(c8064.61,2648.35) 8064.61,2660.04 ccw(c8064.61,2671.73) U8.11@8072.88,2663.46
  Bottom Layer w10: v1(6676,2618) 6753,2695 7761.57,2695 7796.53,2660.04 v1(8030,2660.04) ; v1@6676,2625 ccw(c6676,2641.9) 6687.95,2629.95 ccw(c6699.9,2618) v1@6683,2618 ; v1@8025.05,2655.09 ccw(c8013.1,2643.14) 8013.1,2660.04 ccw(c8013.1,2676.94) v1@8025.05,2664.99
LED_DIN: U5.1 U8.10 | length 1676.9
  Top Layer w20: v1(8052,2693) 8052,2692 8051.54,2691.54 U8.10@8095,2691.54
  Bottom Layer w10: v1(6524,2619) 6557,2619 6653,2715 7769.85,2715 7793.32,2691.54 8051.54,2691.54 8052,2692 v1(8052,2693) ; v1@6528.95,2614.05 cw(c6540.9,2602.1) 6540.9,2619 cw(c6540.9,2635.9) v1@6528.95,2623.95 ; 8031.56,2691.54 ccw(c8031.56,2713.44) v1@8047.05,2697.95 ; 8038.64,2691.54 cw(c8038.64,2679.64) v1@8047.05,2688.05
LED_G: R23.2 R24.1 U5.5 | length 3800.2
  Top Layer w15: v4(5310,4869) R24.1@5400,4869 ; R23.2@5315.3,4863.7 cw(c5328.11,4850.89) 5328.11,4869 cw(c5328.11,4887.11) R23.2@5315.3,4874.3 ; R23.2@5327.37,4856.63 cw(c5357.25,4826.75) 5357.25,4869 cw(c5357.25,4911.25) R23.2@5327.37,4881.37 ; R24.1@5382.63,4856.63 ccw(c5352.75,4826.75) 5352.75,4869 ccw(c5352.75,4911.25) R24.1@5382.63,4881.37 ; v1(6700,3080) 6555,3080 6478,3003 6478,2698 6513,2663 6698,2663 6725,2636 U5.5@6725,2605 ; 6715.2,2645.8 cw(c6702.39,2633) U5.5@6720.5,2633
  Bottom Layer w15: v4@5304.7,4863.7 cw(c5284.65,4843.65) 5313,4843.65 ; v4@5313,4876 5313,4811.96 5277.5,4776.46 5277.5,4084.15 5754.65,3607 6173,3607 v1(6700,3080) v1@6700,3085
LED_R: R25.2 R26.1 U5.7 | length 3419.5
  Top Layer w15: v4(5313,4766) R26.1@5403,4766 ; R25.2@5318.3,4760.7 cw(c5331.11,4747.89) 5331.11,4766 cw(c5331.11,4784.11) R25.2@5318.3,4771.3 ; R25.2@5327.37,4753.63 cw(c5357.25,4723.75) 5357.25,4766 cw(c5357.25,4808.25) R25.2@5327.37,4778.37 ; R26.1@5382.63,4753.63 ccw(c5352.75,4723.75) 5352.75,4766 ccw(c5352.75,4808.25) R26.1@5382.63,4778.37 ; v1(6785,3080) 6785,2984.72 6904.5,2865.22 6904.5,2767.5 6825,2688 U5.7@6825,2605
  Bottom Layer w15: v4@5313,4758.5 cw(c5313,4740.39) 5325.8,4753.2 cw(c5338.61,4766) v4@5320.5,4766 ; v4(5313,4766) 5353,4726 5353,4079.36 5775.36,3657 6218,3657 6785,3090 v1(6785,3080) ; 6770.25,3104.75 cw(c6745.49,3080) v1@6780.5,3080
NetB_2: B.2 Q6.3 | length 713.4
  Top Layer w15: Q6.3@4051.5,2584 4389,2584 4500.87,2695.87 B.2@4514.13,2695.87 ; Q6.3@4058.92,2576.58 cw(c4076.85,2558.65) 4076.85,2584 cw(c4076.85,2609.35) Q6.3@4058.92,2591.42 ; 4445.62,2640.62 cw(c4510.6,2575.64) B.2@4510.6,2667.53 ; 4460.57,2655.57 ccw(c4416.74,2699.4) B.2@4478.73,2699.4 ; 4471.23,2666.23 cw(c4510.6,2626.85) B.2@4510.6,2682.53
NetC2_2: C2.2 U1.3 | length 434.7
  Top Layer w30: C2.2@2984,2719 2984.36,2719 3050,2784.64 3050,2875 3168,2993 U1.3@3224.5,2993 ; C2.2@2999,2719 cw(c3034.36,2719) 3009.36,2744
NetC3_2: C3.2 R2.2 R3.2 U1.5 | length 1151.8
  Top Layer w30: R2.2@2890,2615 2890,2615.36 2923.64,2649 ; R2.2@2908.82,2600.87 cw(c2961.71,2610.93) 2923.64,2649 ; 3402.8,2906.3 ccw(c3366.09,2943) U1.5@3418,2943 ; 3591.39,2906.61 cw(c3565.79,2881) C3.2@3602,2881 ; R3.2@3617,2981 C3.2@3617,2881 3555,2943 U1.5@3439.5,2943 3369,2872.5 3249.64,2872.5 3235,2857.86 3235,2787.14 3117.3,2669.45 3024.8,2669.45 3004.36,2649 2923.64,2649
NetC9_2: C9.2 U5.14 | length 378.4
  Top Layer w15: v1(6526,2698) 6538,2698 6625,2785 U5.14@6625,2825 ; v1@6526,2702.5 ccw(c6526,2742.33) 6554.17,2714.17 ; 6608.83,2768.83 ccw(c6580.67,2797) U5.14@6620.5,2797
  Bottom Layer w15: v1(6435,2610) v1@6524.5,2699.5 ; 6513.2,2688.2 cw(c6526,2675.39) v1@6526,2693.5